# Altium PCB captivate_proximity.PcbDoc
Units mil, origin at the board's own origin, x right, y up, seen from the top; angles counter-clockwise.
Board outline 5000 x 3000 mil, 2 copper layers (Top Layer, Bottom Layer), stack 62 mil thick; 24 components, 35 nets, 82 pads, 11 vias.
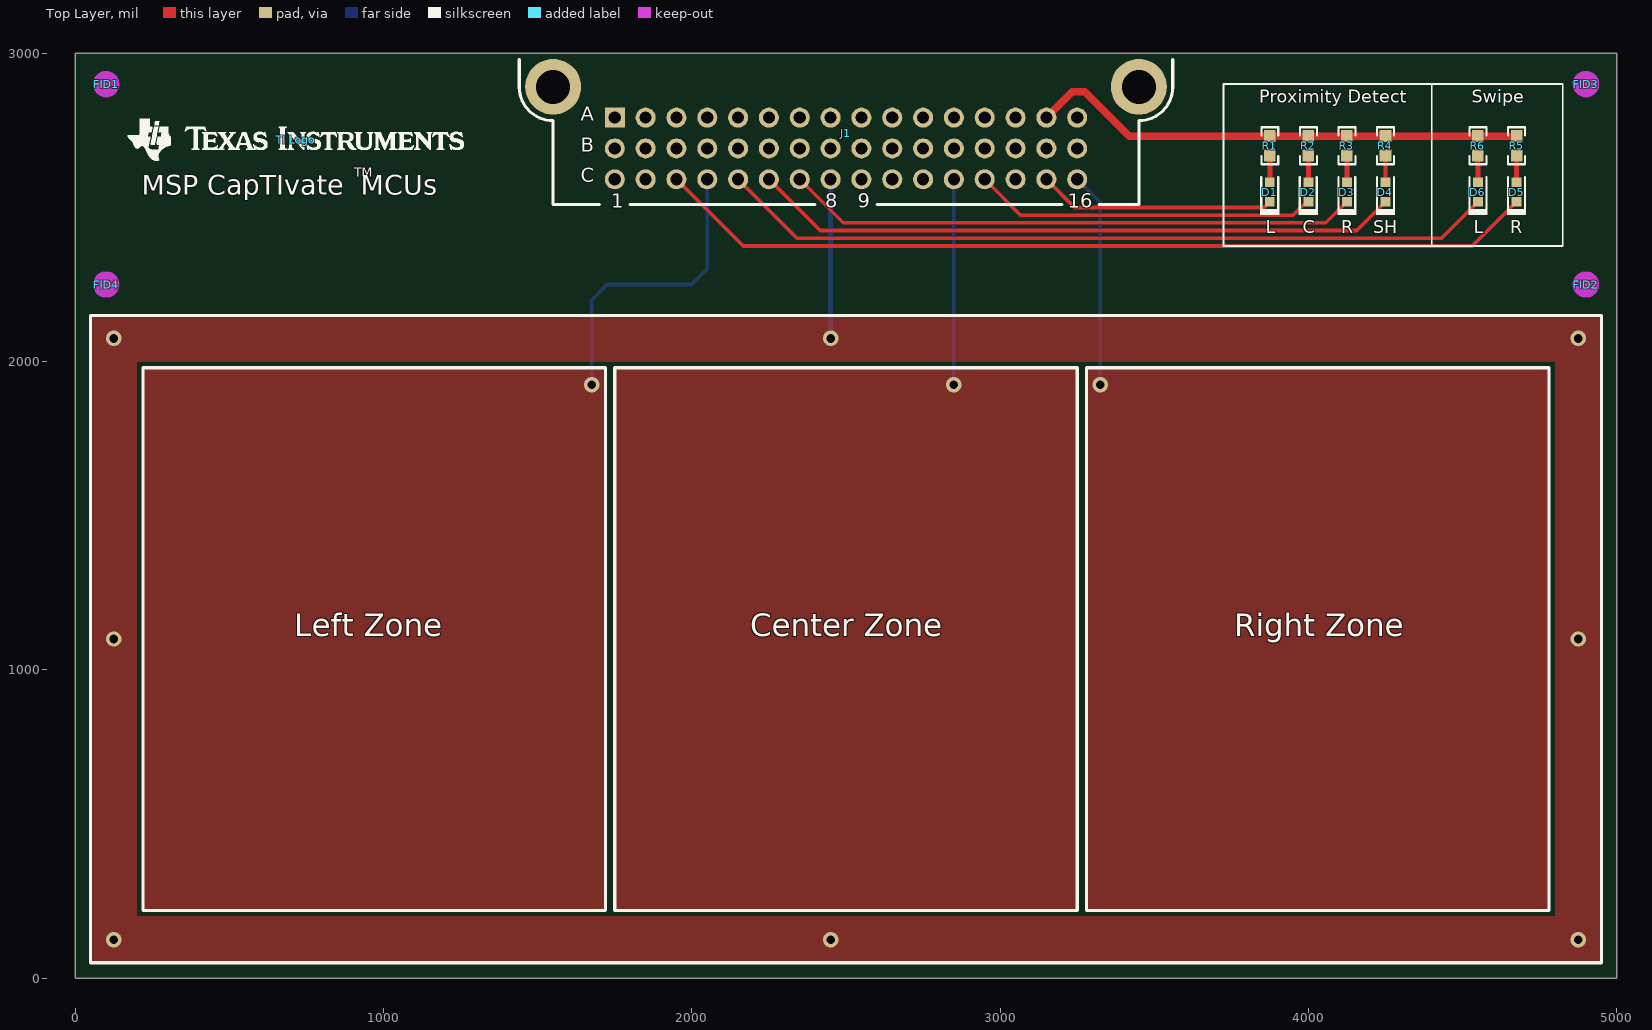
[diagram p0: Top Layer view]
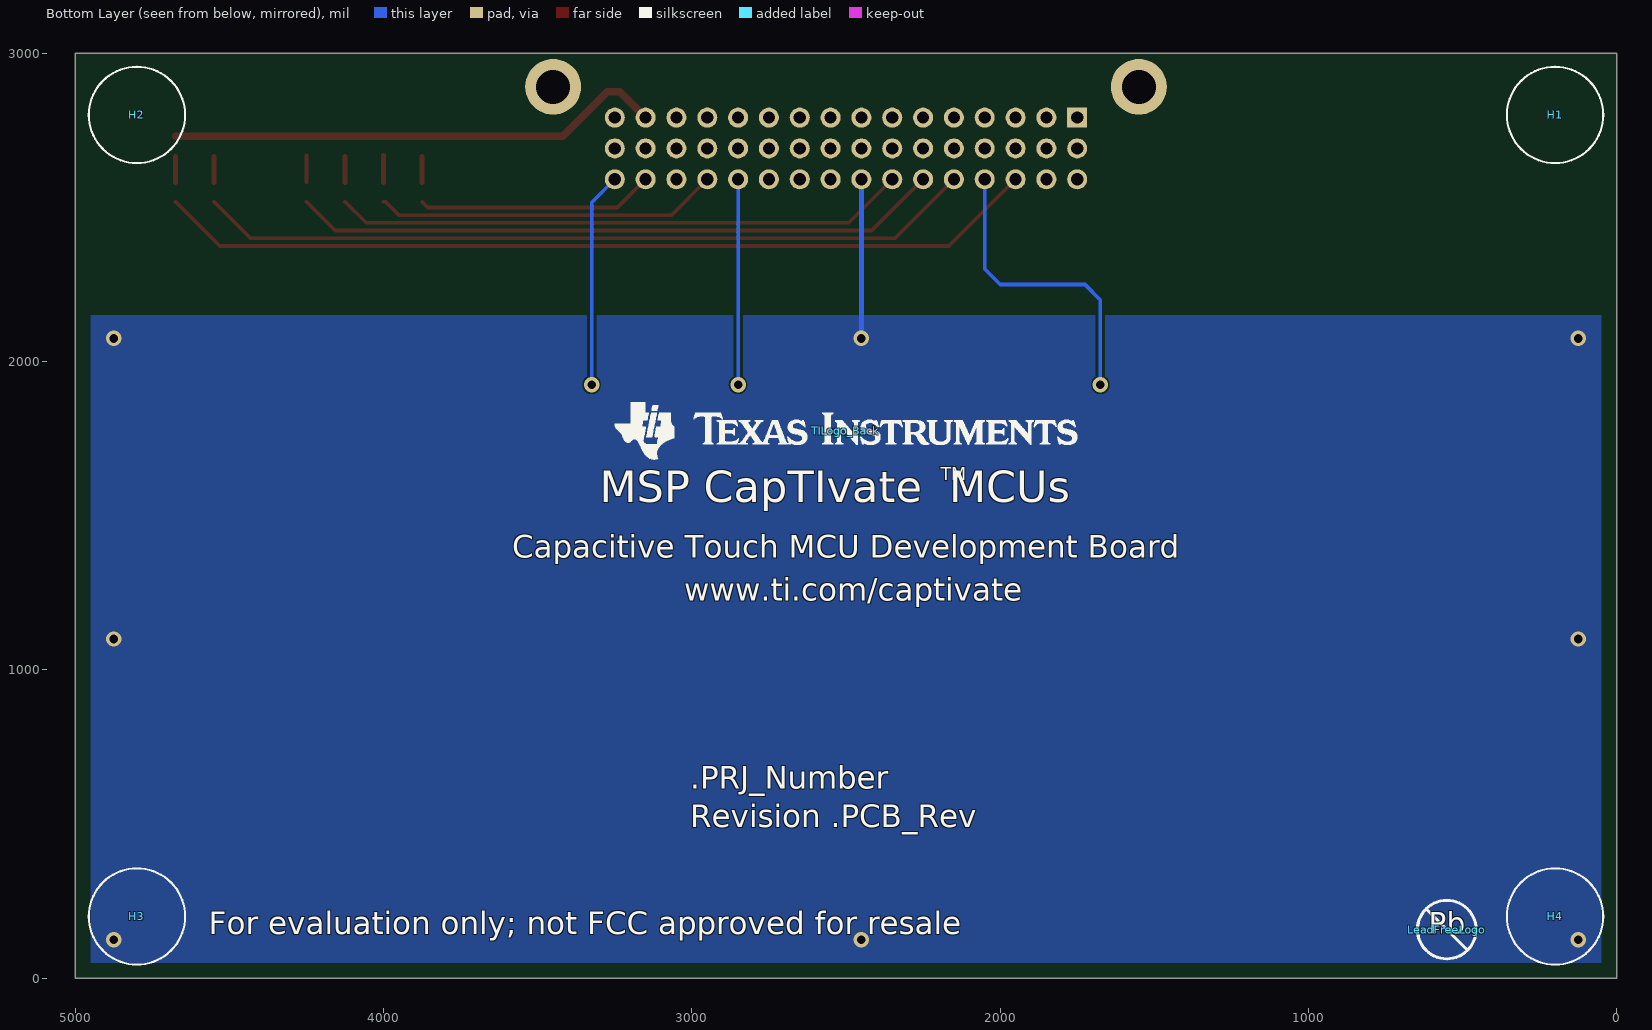
[diagram p1: Bottom Layer view, seen from below]

## Layer stack, top to bottom
Top Solder: solder mask 0.4, Solder Resist, Dk 3.5
Top Layer: signal copper 1.4
Dielectric1: core 59.2, FR-4, Dk 4.8
Bottom Layer: signal copper 1.4
Bottom Solder: solder mask 0.4, Solder Resist, Dk 3.5

## Board outline
0,0 5000,0 5000,3000 0,3000

## Design rules (kind name [scope] priority, off if disabled: settings)
AcuteAngle [All] p1: minimum=4.50000000000000E+0001 checktracksonly=FALSE
AssemblyTestPointUsage [All] p1: valid=2
Clearance Clearance_Poly_Bottom_To_Track [OnBottom And InPolygon vs IsTrack] p1: gap=10
Clearance Clearance_Poly_Connectors [(InNamedPolygon('Top Layer Pour')) OR (InNamedPolygon('Bottom Layer Pour')) vs (InComponent('J1')) OR (Incomponent('J2'))] p2: gap=40
Clearance Clearance_Poly_Components [(InNamedPolygon('Top Layer Pour')) OR (InNamedPolygon('Bottom Layer Pour'))] p3: gap=20
Clearance Clearance_General [All] p4: gap=6
Clearance Clearance_BoardEdge_MountingHoles [OnCopper and InComponentClass('Mounting Holes') vs IsKeepOut] p5: gap=40
Clearance Clearance_BoardEdge_Poly [OnCopper and InPoly vs IsKeepOut] p6: gap=7.87
Clearance Clearance_BoardEdge [OnCopper and Not InComponentClass('Logo') and not InComponentClass('FiducialMark') and not InRegion(1000,500,4000,800) and Not IsKeepout vs IsKeepOut] p7: gap=7.87
ComponentClearance ComponentClearance_Logo [InComponentClass('Logo')] p1: gap=7.87 collisioncheckmode=3 verticalgap=7.87 showdistances=TRUE
ComponentClearance ComponentClearance_ScrewToNut [(HasFootprint('NY PMS 440 0025 PH')) vs (HasFootprint('Keystone_1902C'))] p2: gap=5 collisioncheckmode=3 verticalgap=10 showdistances=FALSE
ComponentClearance ComponentClearance_MountingHoles [InComponentClass('Mounting Holes')] p3: gap=250 collisioncheckmode=3 verticalgap=100000 showdistances=FALSE
ComponentClearance ComponentClearance_SmallPassives [HasFootprint('0201*') or HasFootprint('0402*') or HasFootprint('0508') or HasFootprint('0603*') or HasFootprint('0612') or HasFootprint('0805*') or HasFootprint('0815*') or HasFootprint('0830*') or HasFootprint('1206*') or HasFootprint('1210*') or HasFootprint('1808*') or HasFootprint('1812*') or HasFootprint('1825*') or HasFootprint('2010*') or HasFootprint('2220*') or HasFootprint('2225*') or HasFootprint('2512*') or HasFootprint('2728*') or HasFootprint('3518*') vs HasFootprint('0201*') or HasFootprint('0402*') or HasFootprint('0508') or HasFootprint('0603*') or HasFootprint('0612') or HasFootprint('0805*') or HasFootprint('0815*') or HasFootprint('0830*') or HasFootprint('1206*') or HasFootprint('1210*') or HasFootprint('1808*') or HasFootprint('1812*') or HasFootprint('1825*') or HasFootprint('2010*') or HasFootprint('2220*') or HasFootprint('2225*') or HasFootprint('2512*') or HasFootprint('2728*') or HasFootprint('3518*')] p4: gap=20 collisioncheckmode=3 verticalgap=10 showdistances=FALSE
ComponentClearance ComponentClearance_THtoSMT [IsThruComponent vs IsSMTComponent] p5: gap=10 collisioncheckmode=3 verticalgap=100000 showdistances=TRUE
ComponentClearance ComponentClearance_THtoTH [IsThruComponent vs IsThruComponent] p6: gap=50 collisioncheckmode=3 verticalgap=100000 showdistances=FALSE
ComponentClearance [All] p7: gap=40 collisioncheckmode=3 verticalgap=10 showdistances=FALSE
DiffPairsRouting [All] p1: maxlimit=100 minlimit=10 mostfreqgap=10 toplayer_minwidth=15 toplayer_maxwidth=15 toplayer_prefwidth=15 bottomlayer_minwidth=15 bottomlayer_maxwidth=15 bottomlayer_prefwidth=15 maxuncoupledlength=1000
FabricationTestPointUsage TestPointUsage [All] p1: valid=2 allowmultiple=FALSE
FabricationTestpoint Testpoint [All] p1: side=3 testpointundercomponent=TRUE minsize=40 maxsize=100 preferedsize=60 minholesize=0 maxholesize=40 preferedholesize=32 testpointgrid=1 allowsidetop=TRUE allowsidebottom=TRUE usegrid=TRUE gridtolerance=0.01
FanoutControl Fanout_LCC [IsLCC] p1: bgadir=Out bgaviamode=Centered fanoutstyle=Auto fanoutdirection=Alternating viagrid=1 // Fanout_LCC (Default Rule)
FanoutControl Fanout_BGA [IsBGA] p2: bgadir=Out bgaviamode=Centered fanoutstyle=Auto fanoutdirection=Alternating viagrid=1 // Fanout_BGA (Default Rule)
FanoutControl Fanout_Default [All] p4: bgadir=Out bgaviamode=Centered fanoutstyle=Auto fanoutdirection=Alternating viagrid=1 // Fanout_Default (Default Rule)
FanoutControl Fanout_Small [(CompPinCount < 5)] p5: bgadir=Out bgaviamode=Centered fanoutstyle=Auto fanoutdirection=OutThenIn viagrid=1 // Fanout_Small (Default Rule)
HoleSize [All] p1: absolutevalues=TRUE maxlimit=251 minlimit=8 maxpercent=80.000 minpercent=20.000
MinimumAnnularRing [All] p1: minimumring=9
MinimumSolderMaskSliver MinimumSolderMaskSliver_Logo [InComponentClass('Logo') vs InComponentClass('Logo')] p1: minsoldermaskwidth=0.7
MinimumSolderMaskSliver [All] p2: minsoldermaskwidth=4
PlaneConnect [All] p1: planeconnectstyle=Relief reliefexpansion=10 reliefentries=4 reliefconductorwidth=10 reliefairgap=10
PolygonConnect [All] p1: connectstyle=Direct reliefconductorwidth=10 reliefentries=4 polygonreliefangle="45 Angle" airgapwidth=10
RoutingVias [All] p1: holewidth=16 width=34 viastyle="Through Hole" minholewidth=8 minwidth=26 maxholewidth=40 maxwidth=65
SilkToSilkClearance [All] p1: silktosilkclearance=5
SilkToSolderMaskClearance SilkscreenOverComponentPads [IsPad] p1: minsilkscreentomaskgap=5 clearancetoexposedcopper=TRUE
SolderMaskExpansion [All] p1: expansion=3
UnpouredPolygon [All] p1: allowunpoured=FALSE
Width [All] p1: maxlimit=100 minlimit=6 preferedwidth=10 checkconnectedcopper=TRUE
15 further rules are at their usual default settings.

## Classes and differential pairs
component class FiducialMark: FID1 FID2 FID3 FID4
component class Logo: "TI Logo" TILogo_Back

## Components (designator, comment, footprint, x,y, rotation, side; value= is the part's Value field where it differs from the comment)
D1 "150060YS75000" WL-SMCW_YELLOW 3875,2550 r90 top
D2 "150060YS75000" WL-SMCW_YELLOW 4000,2550 r90 top
D3 "150060YS75000" WL-SMCW_YELLOW 4125,2550 r90 top
D4 "150060YS75000" WL-SMCW_YELLOW 4250,2550 r90 top
D5 "150060VS75000" WL-SMCW_GREEN 4675,2550 r90 top
D6 "150060VS75000" WL-SMCW_GREEN 4550,2550 r90 top
FID1 "Fiducial" Fiducial10-20 100,2900 r0 top
FID2 "Fiducial" Fiducial10-20 4900,2250 r0 top
FID3 "Fiducial" Fiducial10-20 4900,2900 r0 top
FID4 "Fiducial" Fiducial10-20 100,2250 r0 top
H1 "SJ61A1" Bumpon_SJ61A1 200,2800 r90 bottom
H2 "SJ61A1" Bumpon_SJ61A1 4800,2800 r90 bottom
H3 "SJ61A1" Bumpon_SJ61A1 4800,200 r90 bottom
H4 "SJ61A1" Bumpon_SJ61A1 200,200 r90 bottom
J1 "CAPTIVATE-CONN-PANEL" CAPTIVATE-CONN-48 2500,3000 r0 top
LeadFreeLogo "Pb-Free Symbol" Pb-Free_Overlay_Medium 551.18,157.48 r180 bottom
R1 "CRCW0603274RFKEA" 0603 3875,2700 r270 top
R2 "CRCW0603274RFKEA" 0603 4000,2700 r270 top
R3 "CRCW0603274RFKEA" 0603 4125,2700 r270 top
R4 "CRCW0603274RFKEA" 0603 4250,2700 r270 top
R5 "CRCW0603274RFKEA" 0603 4675,2700 r270 top
R6 "CRCW0603274RFKEA" 0603 4550,2700 r270 top
"TI Logo" "Texas Instruments" TI_Horizontal_Overlay_Small 715,2720 r0 top
TILogo_Back "Texas Instruments" TI_Horizontal_Overlay_Medium 2500,1775 r180 bottom

## Footprints (in the part's own frame and the unit in brackets; to place one, negate y for a bottom-side part, rotate by r counter-clockwise, add the part's x,y. Pads: shape width x height; smd on the part's side, far side on the other; paste and mask are expansions set on the pad)
0603 [mm] "0603 from SM-752 data"
  rect 1x0.95 smd: 1(-0.8,0) 2(0.8,0)
  silkscreen extent -1.52,-0.69 1.52,0.69, body extent -0.87,-0.47 0.87,0.47, height 0.85
Bumpon_SJ61A1 [mil] "3M Cylindrical Bumpon black"
  round 1 on Mech4: 0(0,0)
  silkscreen extent -156,-156 156,156, body extent -156,-155 156,156, height 201
CAPTIVATE-CONN-48 [mm] "Connector, 3x16, 100mil, TH, RA"
  rect 1.65x1.65 hole 1: A1(-19.05,-5.3)
  round 1.65 hole 1: A2(-16.51,-5.3) A3(-13.97,-5.3) A4(-11.43,-5.3) A5(-8.89,-5.3) A6(-6.35,-5.3) A7(-3.81,-5.3) A8(-1.27,-5.3) A9(1.27,-5.3) A10(3.81,-5.3) A11(6.35,-5.3) A12(8.89,-5.3) A13(11.43,-5.3) A14(13.97,-5.3) A15(16.51,-5.3) A16(19.05,-5.3) B1(-19.05,-7.84) B2(-16.51,-7.84) B3(-13.97,-7.84) B4(-11.43,-7.84) B5(-8.89,-7.84) B6(-6.35,-7.84) B7(-3.81,-7.84) B8(-1.27,-7.84) B9(1.27,-7.84) B10(3.81,-7.84) B11(6.35,-7.84) B12(8.89,-7.84) B13(11.43,-7.84) B14(13.97,-7.84) B15(16.51,-7.84) B16(19.05,-7.84) C1(-19.05,-10.38) C2(-16.51,-10.38) C3(-13.97,-10.38) C4(-11.43,-10.38) C5(-8.89,-10.38) C6(-6.35,-10.38) C7(-3.81,-10.38) C8(-1.27,-10.38) C9(1.27,-10.38) C10(3.81,-10.38) C11(6.35,-10.38) C12(8.89,-10.38) C13(11.43,-10.38) C14(13.97,-10.38) C15(16.51,-10.38) C16(19.05,-10.38)
  round 4.6 hole 2.8: H1(-24.13,-2.76) H2(24.13,-2.76)
  silkscreen extent -26.92,-12.45 26.92,-0.51
Fiducial10-20 [mm]
  round 1 smd mask+0.5: 1(0,0)
  Top Layer keep-out circle w1.178: c0,0 r0.5
Pb-Free_Overlay_Medium [mil]
  silkscreen extent -95,-95 95,95
TI_Horizontal_Overlay_Medium [mil]
  silkscreen extent -750,-93 750,94
TI_Horizontal_Overlay_Small [mil]
  silkscreen extent -545,-68 545,67
WL-SMCW_GREEN [mm] "WURTH"
  rect 0.8x0.8 smd: 1(-0.8,0) 2(0.8,0)
  silkscreen extent -1.9,-0.8 1.2,0.8, body extent -0.85,-0.45 0.85,0.45, height 0.8
WL-SMCW_YELLOW [mm] "WURTH"
  rect 0.8x0.8 smd: 1(-0.8,0) 2(0.8,0)
  silkscreen extent -1.9,-0.8 1.2,0.8, body extent -0.85,-0.45 0.85,0.45, height 0.8

## Part data
D1 D2 D3 D4: "LED, Yellow, SMD"
D5 D6: "LED, Green, SMD"
FID1 FID2 FID3 FID4: "Fiducial mark.  There is nothing to buy or mount."
H1 H2 H3 H4: "Bumpon, Cylindrical, 0.312 X 0.200, Black"
J1: library part CAPTIVATE-CONN-MSP-EXP430FR2633-PANEL, "CapTIvate Panel-Side Connector, 3x16, 100mil, TH, RA, M, MSP-EXP430FR2633"
LeadFreeLogo: library part Pb-Free
R1 R2 R3 R4 R5 R6: "RES, 274, 1%, 0.1 W, 0603"
"TI Logo" TILogo_Back: library part TI_Logo, "Texas Instrument Corporate Signature"

## Via types
v1: diameter 50, hole 28, Top Layer to Bottom Layer, tented both sides, 11 vias

## Nets (pads, with @x,y where several pads share a name; then routed paths per layer and width w, separated by ;. In a path a pad name is that pad's centre, name@x,y a point inside that pad or via, vN(x,y) a via of type N, cw(c..) or ccw(c..) an arc to the next point about the centre after c; other vN are vias at no path point)
CAP0.2: D5.1 J1.C3 | length 2874.1
  Top Layer w12: J1.C3 2166.34,2375 4531.5,2375 D5.1
CAP0.3: J1.C4 | length 982.8
  Bottom Layer w12: v1(1675,1925) 1675,2200 1725,2250 2000,2250 2050,2300 J1.C4
CAP1.0: D6.1 J1.C5 | length 2528.3
  Top Layer w12: J1.C5 2341.34,2400 4431.5,2400 D6.1
CAP1.1: D4.1 J1.C6 | length 2107.6
  Top Layer w12: J1.C6 2416.34,2425 4156.5,2425 D4.1
CAP1.2: D3.1 J1.C7 | length 1861.9
  Top Layer w12: J1.C7 2491.34,2450 4056.5,2450 D3.1
CAP1.3: J1.C8 | length 516.3
  Bottom Layer w16: v1(2450,2075) J1.C8
  other v1: 125,125 2450,125 4875,125 125,1100 4875,1100 125,2075 4875,2075
CAP2.3: J1.C12 | length 666.3
  Bottom Layer w12: v1(2850,1925) J1.C12
CAP3.0: D2.1 J1.C13 | length 1116.2
  Top Layer w12: J1.C13 3066.34,2475 3950,2475 3993.5,2518.5 D2.1
CAP3.2: D1.1 J1.C15 | length 770.5
  Top Layer w12: J1.C15 3241.34,2500 3856.5,2500 D1.1
CAP3.3: J1.C16 | length 697.4
  Bottom Layer w12: J1.C16 3325,2516.34 v1(3325,1925)
E0_LED: D1.2 R1.2 | length 84.1
  Top Layer w16: D1.2 R1.2@3875,2665.57
E1_LED: D2.2 R2.2 | length 87
  Top Layer w16: D2.2 R2.2
E2_LED: D3.2 R3.2 | length 84.1
  Top Layer w16: D3.2 R3.2@4125,2665.57
NetJ1_A1: J1.A1
NetJ1_A2: J1.A2
NetJ1_A3: J1.A3
NetJ1_A4: J1.A4
NetJ1_A5: J1.A5
NetJ1_A11: J1.A11
NetJ1_A12: J1.A12
NetJ1_A13: J1.A13
NetJ1_A14: J1.A14
NetJ1_A16: J1.A16
NetJ1_C1: J1.C1
NetJ1_C2: J1.C2
NetJ1_C9: J1.C9
NetJ1_C10: J1.C10
NetJ1_C11: J1.C11
NetJ1_C14: J1.C14
NetJ1_H1: J1.H1
NetJ1_H2: J1.H2
SHIELD_LED: D4.2 R4.2 | length 87
  Top Layer w12: D4.2 R4.2
SL_LED: D6.2 R6.2 | length 84.1
  Top Layer w16: D6.2 R6.2@4550,2665.57
SR_LED: D5.2 R5.2 | length 84.1
  Top Layer w16: D5.2 R5.2@4675,2665.57
VCC_3P3V: J1.A15 R1.1 R2.1 R3.1 R4.1 R5.1 R6.1 | length 1619.1
  Top Layer w24: J1.A15 3233.66,2875 3275,2875 3418.5,2731.5 R1.1 R6.1 R5.1
pads on no net: FID1.1 FID2.1 FID3.1 FID4.1 H1.0 H2.0 H3.0 H4.0 J1.A6 J1.A7 J1.A8 J1.A9 J1.A10 J1.B1 J1.B2 J1.B3 J1.B4 J1.B5 J1.B6 J1.B7 J1.B8 J1.B9 J1.B10 J1.B11 J1.B12 J1.B13 J1.B14 J1.B15 J1.B16

## Polygon pours and split planes (outlines as drawn)
CAP1.3 on Bottom Layer "Bottom Layer-No Net" (solid, remove dead copper, pour order 8): 50,2150 50,50 4950,50 4950,2150 50,2150
CAP1.3 on Top Layer "Top Layer-No Net 3" (solid, remove dead copper, pour order 16): 50,200 4950,200 4950,50 50,50 50,200
CAP1.3 on Top Layer "Top Layer-No Net 2" (solid, remove dead copper, pour order 14): 50,2150 4950,2150 4950,2000 50,2000 50,2150
CAP1.3 on Top Layer "Top Layer-No Net 1" (solid, remove dead copper, pour order 12): 4800,2150 4800,50 4950,50 4950,2150 4800,2150
CAP1.3 on Top Layer "Top Layer-No Net" (solid, remove dead copper, pour order 10): 50,2150 200,2150 200,50 50,50 50,2150
CAP0.3 on Top Layer "Top Layer-No Net 4" (solid, remove dead copper, pour order 7): 220,1980 1720,1980 1720,220 220,220 220,1980
CAP2.3 on Top Layer "Top Layer-No Net 5" (solid, remove dead copper, pour order 9): 1750,1980 3250,1980 3250,220 1750,220 1750,1980
CAP3.3 on Top Layer "Top Layer-No Net 6" (solid, remove dead copper, pour order 11): 3280,1980 4780,1980 4780,220 3280,220 3280,1980

## Silkscreen, mask and mechanical layers (free items; w line width, h text height)
Top Overlay:
  lines w6: 4400,2375 4400,2900 ; 3725,2375 3725,2900 4825,2900 4825,2375 3725,2375
  lines w10: 50,50 50,2150 4950,2150 4950,50 50,50 ; 220,220 220,1980 1720,1980 1720,220 220,220 ; 1750,220 1750,1980 3250,1980 3250,220 1750,220 ; 3280,220 3280,1980 4780,1980 4780,220 3280,220
  text "Proximity Detect" at 3840,2825 h70
  text "Swipe" at 4530,2825 h70
  text "TM" at 905,2590 h50
  text "MSP CapTIvate  MCUs" at 215,2520 h110
  text "L" at 3862,2402 h70
  text "C" at 3982,2402 h70
  text "R" at 4107,2402 h70
  text "SH" at 4211,2402 h70
  text "L" at 4537,2402 h70
  text "R" at 4655,2402 h70
  text "Left Zone" at 710,1085 h125
  text "Center Zone" at 2190,1085 h125
  text "Right Zone" at 3760,1085 h125
Bottom Overlay:
  text "TM" at 2192.52,1600 h70
  text "MSP CapTIvate  MCUs" at 3298.52,1509 h175
  text "Capacitive Touch MCU Development Board" at 3582.68,1338.58 h125
  text "www.ti.com/captivate" at 3025,1200 h125
  text ".PRJ_Number" at 3005,590 h125
  text ".PCB_Rev" at 2550,465 h125
  text "Revision" at 3005,465 h125
  text "For evaluation only; not FCC approved for resale" at 4566.93,118.11 h125
M1 Board Outline:
  the board outline again, w10
M2 Board Dimensions:
  rectangle: -510.5,-1745.5 -385.5,-1620.5
  rectangle: -385.5,-1870.5 -10.5,-1745.5
  lines w7: -510.5,-1745.5 489.5,-1745.5 ; -385.5,-1870.5 -385.5,-1620.5 ; -260.5,-1870.5 -260.5,-1620.5 ; -10.5,-1870.5 -10.5,-1620.5 ; 239.5,-1870.5 239.5,-1620.5 ; -510.5,-1870.5 489.5,-1870.5 489.5,-1620.5 -510.5,-1620.5 -510.5,-1870.5
  lines w10: -510.5,-1935.5 -510.5,-1915.5 ; -450.5,-1945.5 -510.5,-1925.5 ; -450.5,-1905.5 -510.5,-1925.5 ; -286.42,-1925.5 -510.5,-1925.5 ; 265.42,-1925.5 489.5,-1925.5 ; 429.5,-1945.5 489.5,-1925.5 ; 429.5,-1905.5 489.5,-1925.5 ; 489.5,-1935.5 489.5,-1915.5
  text "1000 (mil)" at -276.42,-1961.49 h60
M3 3D STEP Top:
  text ".Layer_Name" at 67,-2318.49 h60
M4 3D STEP Bottom:
  text ".Layer_Name" at 67,-2318.49 h60
M5 Assembly Top:
  lines w7: 9529,-1749.5 10654,-1749.5 ; 9529,-1627 10651.5,-1627 ; 9844,-1869.5 9844,-1507 ; 10229,-1869.5 9529,-1869.5 ; 10229,-1507 9529,-1507 ; 9529,-1869.5 10654,-1869.5 10654,-1507 9529,-1507 ; 9529,-1869.5 9529,-1507
  lines w10: -802,-2390.17 5798,-2390.17 ; -802,-2186.83 5800,-2186.83 ; -802,-1983.5 -802,-2593.5 3203,-2593.5 5800,-2593.5 5800,-1983.5 -801.5,-1983.5 -801.5,-2593.5 774,-2593.5 ; 1663,-2593.5 1663,-1983.5 ; 2930,-2186.83 2930,-1983.5 ; 3770,-2186.83 3770,-1983.5 ; 4392,-2600 4392,-2397.17
  text "TABLE 1" at 9916.5,-1472 h40
  text "Variant" at 9554,-1582 h40
  text "Label text" at 9989,-1582 h40
  text "001" at 9621.5,-1702 h40
  text "ChangeMe!" at 9899,-1704.5 h40
  text "COMPONENTS MARKED 'DNP' SHOULD NOT BE POPULATED." at 643.5,-1778.5 h60
  text "002" at 9621.5,-1827 h40
  text "ChangeMe!" at 9894,-1829.5 h40
  text "ASSEMBLY VARIANT:" at 643,-1894 h60
  text ".VariantName" at 1679,-1894 h60
  text "PCB VIEWED FROM TOP SIDE" at -738.5,-2115.67 h60
  text "BOARD #:" at 1738,-2115.67 h60
  text ".PRJ_Number" at 2283.5,-2115.67 h60
  text "REV:" at 3128,-2115.67 h60
  text ".PCB_Rev" at 3419.5,-2115.67 h60
  text "SVN REV:" at 3966,-2115.67 h60
  text ".VersionControl_RevNumber" at 4472,-2115.67 h60
  text "IGNORE ->" at -738.5,-2318.49 h60
  text "PLOT NAME =" at -738.5,-2524.34 h60
  text ".plot_File_Name" at 67,-2524.34 h60
  text "GENERATED    :" at 1740,-2524.34 h60
  text ".Print_Date" at 2609.5,-2524.34 h60
  text ".Print_Time" at 3338.5,-2524.34 h60
  text "TEXAS INSTRUMENTS" at 4603,-2524.34 h60
M6 Assembly Bottom:
  lines w10: -802.5,-2187.33 5799.5,-2187.33 ; -800.5,-2390.67 5799.5,-2390.67 ; 605.5,-2600.5 605.5,-2397.67 ; 1227.5,-2187.33 1227.5,-1984 ; 2067.5,-2187.33 2067.5,-1984 ; 3334.5,-2594 3334.5,-1984 ; 4223.5,-2594 5799,-2594 5799,-1984 -802.5,-1984 -802.5,-2594 1794.5,-2594 5799.5,-2594 5799.5,-1984
  text "COMPONENTS MARKED 'DNP' SHOULD NOT BE POPULATED." at 5592,-1778 h60
  text ".VariantName" at 4548,-1894 h60
  text "ASSEMBLY VARIANT:" at 5587,-1894 h60
  text ".PCB_Rev" at 1860,-2110 h60
  text ".PRJ_Number" at 2714,-2116.17 h60
  text "BOARD #:" at 3259.5,-2116.17 h60
  text "PCB VIEWED FROM BOTTOM SIDE" at 5736,-2116.17 h60
  text "IGNORE ->" at 2037.85,-2318.49 h60
  text "TEXAS INSTRUMENTS" at 394.5,-2524.84 h60
  text ".plot_File_Name" at 4930.5,-2524.84 h60
  text "PLOT NAME =" at 5736,-2524.84 h60
  text ".Print_Time" at 1690,-2530 h60
  text ".Print_Date" at 2419,-2530 h60
  text "GENERATED    :" at 3288.5,-2530 h60
M9 Title Sheet:
  drawing of 57 lines, arcs and shapes, not listed
  text "1" at 229.84,6576.5 h70
  text "2" at 2725.5,6576.5 h70
  text "3" at 5214.84,6576.5 h70
  text "4" at 7721.51,6576.5 h70
  text "5" at 10220.5,6576.5 h70
  text "6" at 12725.5,6576.5 h70
  text "A" at -926.5,5433.5 h70
  text "A" at 13873.5,5433.5 h70
  text "B" at -926.5,3053.5 h70
  text "B" at 13873.5,3053.5 h70
  text "C" at -926.5,678.5 h70
  text "C" at 13873.5,678.5 h70
  text "PROJECT TITLE:" at 10833.5,-1182.5 h45
  text "TICAPEVM_BSWPDEMO" at 10883.5,-1315.83 h70
  text "DESIGNED FOR:" at 10833.5,-1483.5 h45
  text ".PRJ_Customer" at 10883.5,-1623.5 h70
  text "D" at -926.5,-1691.5 h70
  text "D" at 13873.5,-1691.5 h70
  text "FILE NAME:" at 10833.5,-1783.5 h45
  text ".PCB_File_Name_No_Path" at 10883.5,-1903.5 h70
  text "Texas Instruments (TI) and/or its licensors do not warrant the accuracy or completeness of this specification" at 5864,-2065.34 h45
  text "ENGINEER:" at 10833.5,-2073.5 h45
  text "LAYOUT BY:" at 12338.5,-2073.5 h45
  text "or any information contained therein. TI and/or its licensors do not warrant that this design will meet" at 5819.01,-2178 h45
  text "W. Schnoor" at 10883.5,-2228.49 h70
  text "W. Schnoor" at 12389,-2228.49 h70
  text "the specifications, will be suitable for your application or fit for any particular purpose, or will operate in" at 5819.01,-2290.67 h45
  text "ALTIUM DESIGNER VERSION:" at 12338.5,-2383.5 h45
  text "an implementation. TI and/or its licensors do not warrant that the design is production worthy. You should" at 5819.01,-2403.33 h45
  text "completely validate and test your design implementation to confirm the system functionality for your application." at 5864,-2516 h45
  text ".print_Scale" at 10883.5,-2516.83 h70
  text ".Application_BuildNumber" at 12389,-2516.83 h70
  text "1" at 229.84,-2723.5 h70
  text "2" at 2725.5,-2723.5 h70
  text "3" at 5214.84,-2723.5 h70
  text "4" at 7721.51,-2723.5 h70
  text "5" at 10220.5,-2723.5 h70
  text "6" at 12725.5,-2723.5 h70
M10 Fab Notes:
  drawing of 207 lines, arcs and shapes, not listed
  text "DESIGN INFORMATION" at 11871.02,5350 h60
  text "(REFER ALSO ARRAY/PANEL PROFILING INFORMATION)" at 11509.46,5188.29 h60
  text "BOARD SIZE" at 10823.46,5184 h60
  text "3450MIL" at 11285.78,5056.18 h60
  text "X" at 11791.46,5056.18 h60
  text "4950MIL" at 12022.78,5056.18 h60
  text "Number of Layers :" at 11226.46,4859 h60
  text "2" at 12321.27,4849 h60
  text "MIN. TRACK WIDTH:" at 11226.46,4720 h60
  text "8" at 12322.7,4720 h60
  text "MIL" at 12477.46,4720 h60
  text "MIN. CLEARANCE:" at 11226.46,4588 h60
  text "8" at 12322.7,4588 h60
  text "MIL" at 12477.46,4588 h60
  text "MIN. VIA PAD SIZE:" at 11226.46,4456 h60
  text "24" at 12292.71,4456 h60
  text "MIL" at 12477.46,4456 h60
  text "0.05mm (2MIL)" at 11921.46,4314.29 h60
  text "MINIMUM ANNULAR RING" at 10897.23,4310 h60
  text "EXTERNAL" at 12629.46,4310 h60
  text "PER" at 11097.23,4192 h60
  text "IPC-D-275 CLASS 2 LEVEL C" at 11317.23,4192 h60
  text "MIL, HOLES" at 12805.46,4079.71 h60
  text "+/-" at 12413,4079 h60
  text "+/-" at 13267,4079 h60
  text "REGISTRATION TOLERANCES:" at 10897.23,4074 h60
  text "METAL" at 12097,4074 h60
  text "5" at 12673.2,4074 h60
  text "3" at 13506.2,4074 h60
  text "MIL" at 13622.46,4074 h60
  text "MATERIAL:" at 10822.46,3864.54 h60
  text "FR-4 High Tg" at 11808.9,3724.21 h60
  text "FR-4" at 11283.46,3715.64 h60
  text "X" at 11655.46,3715.64 h60
  text "OTHER" at 12731.46,3715.64 h60
  text "62 MIL (1.6mm) +/-10%" at 11563.56,3552.92 h60
  text "THICKNESS:" at 10897.23,3548.64 h60
  text "X" at 11435.4,3548.64 h60
  text "OTHER" at 12848.46,3548.64 h60
  text "TOLERANCE:" at 10897.23,3390.64 h60
  text "X" at 11736.53,3390.64 h60
  text "ANSI IPC-6012 TYPE 3 CLASS 2" at 11923.48,3390.64 h60
  text "OTHER +/-" at 11923.46,3234.64 h60
  text "BOW & TWIST:" at 10897.23,3077.64 h60
  text "X" at 11736.53,3077.64 h60
  text "ANSI IPC-6012 TYPE 3 CLASS 2" at 11923.48,3077.64 h60
  text "OTHER +/-" at 11923.46,2919.13 h60
  text "COPPER THICKNESS (FINISHED):" at 10822.46,2783.64 h60
  text "1.4MIL (1oz)" at 11702.46,2630.92 h60
  text "2MIL (1.4oz)" at 12469.46,2630.92 h60
  text "2.8MIL (2oz)" at 13196.46,2630.92 h60
  text "OUTER:" at 11179.46,2626.64 h60
  text "X" at 11574,2626 h60
  text "1.4MIL (1oz)" at 11702.46,2473.92 h60
  text "2.8MIL (2oz)" at 12469.46,2473.92 h60
  text "N/A" at 13196,2474.29 h60
  text "INNER SIGNAL:" at 10890.38,2469.64 h60
  text "X" at 11575.42,2469.64 h60
  text "DRILLING:" at 10822.46,2330.64 h60
  text "REFERENCE:" at 10897.23,2213.64 h60
  text "X" at 11545.46,2213.64 h60
  text "AS SHOWN" at 11732.46,2213.64 h60
  text "X" at 12446.46,2213.64 h60
  text "NC_DRILL FILES" at 12583.46,2213.64 h60
  text "PTH MIN COPPER THICKNESS:" at 10897.23,2055.64 h60
  text "X" at 12247.46,2055.64 h60
  text "1MIL" at 12384.46,2055.64 h60
  text "OTHER" at 12881.46,2055.64 h60
  text "BOARD FINISH:" at 10822.46,1896.64 h60
  text "SILKSCREEN:" at 10977.68,1778.64 h60
  text "X" at 11926.46,1778.64 h60
  text "TOP" at 12052.46,1778.64 h60
  text "X" at 12436.46,1778.64 h60
  text "BOTTOM" at 12563.46,1778.64 h60
  text "SILKSCREEN COLOR:" at 10977.68,1611.64 h60
  text "X" at 11925.42,1611.64 h60
  text "WHITE" at 12052.46,1611.64 h60
  text "OTHER" at 12563.46,1611.64 h60
  text "SOLDER RESIST COLOR:" at 10977.68,1441.64 h60
  text "GREEN" at 11672.46,1282.44 h60
  text "BLUE" at 12263.46,1282.44 h60
  text "OTHER" at 12801.46,1282.44 h60
  text "X" at 12655,1275 h60
  text "BLACK" at 13135,1275 h200
  text "IMMERSION GOLD (ENIG)" at 11883.46,1093.92 h60
  text "SURFACE FINISH:" at 10822.46,1089.64 h60
  text "X" at 11696.51,1089.64 h60
  text "IMM. TIN/SILVER OR EQUIV" at 11152,932.64 h60
  text "OTHER" at 12583.46,932.64 h60
  text "ARRAY/PANEL:" at 10822.46,753.64 h60
  text "CUT AND TRIM PER MECH LAYER 1" at 11883.46,749.35 h60
  text "N.C. ROUTE" at 11883.46,597.64 h60
  text "X" at 12562.46,597.64 h60
  text "V. SCORE" at 12749.46,597.64 h60
  text "CERTIFICATION:" at 10822.46,460.64 h60
  text "MATERIALS AND WORKMANSHIP FOR ALL PCBS" at 11547.46,460.64 h60
  text "TO MEET OR EXCEED THE REQUIREMENTS OF:" at 11547.46,362.64 h60
  text "X" at 11173.96,226.13 h60
  text "ANSI IPC-A-600F CLASS ->" at 11312.96,226.13 h60
  text "X" at 12952.02,226.13 h60
  text "2" at 13070.96,226.14 h60
  text "1" at 12755.96,224.64 h60
  text "3" at 13424.96,224.64 h60
  text "X" at 11176.02,66.64 h60
  text "UL 94V-0" at 11312.96,66.64 h60
  text "X" at 11988.02,66.64 h60
  text "RoHS" at 12124.96,66.64 h60
  text "OTHER" at 12769.36,66.64 h60
  text "PER ORDER" at 13166.42,66.64 h60
  text "ADDITIONAL REQUIREMENTS:" at 10822.46,-74.36 h60
  text "MICROSECTION:" at 10897.23,-189.36 h60
  text "YES" at 11802.96,-189.36 h60
  text "REQUIRED" at 12664.46,-345.51 h60
  text "BARE BOARD ELEC. TEST:" at 10897.23,-348.36 h60
  text "NONE" at 12202.96,-348.36 h60
  text "X" at 12537.46,-348.36 h60
  text "PER ORDER" at 13256.46,-348.36 h60
  text "MANUFACTURER'S ID/LOGO:" at 10897.23,-505.36 h60
  text "RAIL" at 12362.96,-509.65 h60
  text "X" at 12737.46,-509.65 h60
  text "METAL" at 12854.77,-509.65 h60
  text "SILK" at 13366.46,-509.65 h60
  text ".Layer_Name" at 67,-2318.49 h60
M11 Gerber Information:
  lines w10: -802,-2390.17 5798,-2390.17 ; -802,-2186.83 5800,-2186.83 ; -802,-1983.5 -802,-2593.5 3203,-2593.5 5800,-2593.5 5800,-1983.5 -801.5,-1983.5 -801.5,-2593.5 774,-2593.5 ; 1663,-2593.5 1663,-1983.5 ; 2930,-2186.83 2930,-1983.5 ; 3770,-2186.83 3770,-1983.5 ; 4392,-2600 4392,-2397.17
  text "ALL ARTWORK VIEWED FROM TOP SIDE" at -738.5,-2115.67 h60
  text "BOARD #:" at 1738,-2115.67 h60
  text ".PRJ_Number" at 2283.5,-2115.67 h60
  text "REV:" at 3128,-2115.67 h60
  text ".PCB_Rev" at 3419.5,-2115.67 h60
  text "SVN REV:" at 3966,-2115.67 h60
  text ".VersionControl_RevNumber" at 4472,-2115.67 h60
  text "LAYER NAME =" at -738.5,-2318.49 h60
  text "PLOT NAME =" at -738.5,-2524.34 h60
  text ".plot_File_Name" at 67,-2524.34 h60
  text "GENERATED    :" at 1740,-2524.34 h60
  text ".Print_Date" at 2609.5,-2524.34 h60
  text ".Print_Time" at 3338.5,-2524.34 h60
  text "TEXAS INSTRUMENTS" at 4603,-2524.34 h60
M12 Stackup:
  lines w6: 10850,6000 13400,6000 ; 10850,6104.4 13400,6104.4 ; 10790,5515 ccw(c10824,5515) 10824,5481 13426,5481 ccw(c13426,5515) 13460,5515 13460,6221 ccw(c13426,6221) 13426,6255 10824,6255 ccw(c10824,6221) 10790,6221 10790,5515
  text "The Stackup Legend below this is static." at 11095.5,6414.5 h60
  text "If you change the stackup, update the Legend." at 11105.5,6324.5 h60
  text "Layer Stack Up Detail for: Ref_Design.PcbDoc" at 10850,6137.1 h57
  text "Layer" at 10850,6065.4 h24
  text "Gerber" at 11745.81,6065.4 h24
  text "Copper" at 12309.33,6065.4 h24
  text "Dielectric" at 12912.04,6065.4 h24
  text "Name" at 10850,6017.4 h24
  text "Document" at 11745.81,6017.4 h24
  text "Thickness" at 12309.33,6017.4 h24
  text "Material" at 12912.04,6017.4 h24
  text "Top Solder Mask" at 10850,5924.44 h34
  text "(.GTS)" at 11745.81,5924.44 h34
  text "Solder Resist" at 12912.04,5924.44 h34
  text "Top Layer" at 10850,5827.69 h34
  text "(.GTL)" at 11745.81,5827.69 h34
  text "1.4mil" at 12309.33,5827.69 h34
  text "FR-4" at 12912.04,5779.31 h34
  text "Bottom Layer" at 10850,5730.94 h34
  text "(.GBL)" at 11745.81,5730.94 h34
  text "1.4mil" at 12309.33,5730.94 h34
  text "Bottom Solder Mask" at 10850,5634.19 h34
  text "(.GBS)" at 11745.81,5634.19 h34
  text "Solder Resist" at 12912.04,5634.19 h34
Mechanical 18:
  lines w1: 0,0 5000,0 5000,3000 3610,3000 ccw(c3610,2980) 3590,2980 3590,2770 cw(c3570,2770) 3570,2750 3340,2750 ccw(c3340,2710) 3300,2710 3300,2560 cw(c3280,2560) 3280,2540 1700,2540 cw(c1700,2560) 1680,2560 1680,2710 ccw(c1640,2710) 1640,2750 1430,2750 cw(c1430,2770) 1410,2770 1410,2980 ccw(c1390,2980) 1390,3000 0,3000 0,0 ; 3705,2370 ccw(c3720,2370) 3720,2355 4830,2355 ccw(c4830,2370) 4845,2370 4845,2905 ccw(c4830,2905) 4830,2920 3720,2920 ccw(c3720,2905) 3705,2905 3705,2370

## Dimensions
4780,1980 to 4780,220 on M2 Board Dimensions
5000,3000 to 5000,0 on M2 Board Dimensions
4950,50 to 4950,2150 on M2 Board Dimensions
220,220 to 4780,220 on M2 Board Dimensions
220,220 to 1720,220 on M2 Board Dimensions
1720,220 to 1750,220 on M2 Board Dimensions
1750,220 to 3250,220 on M2 Board Dimensions
3250,220 to 3280,220 on M2 Board Dimensions
0,0 to 5000,0 on M2 Board Dimensions

## Text inside footprints (layer, text, board x,y; h text height)
J1: Top Overlay "1" at 1738,2482 h80; Top Overlay "A" at 1640,2765 h80; Top Overlay "B" at 1640,2665 h80; Top Overlay "C" at 1640,2565 h80; Top Overlay "8" at 2433,2483 h80; Top Overlay "16" at 3220,2483 h80; Top Overlay "9" at 2538,2483 h80; M2 Board Dimensions "PCB Edge" at 2420,2960 h23.62
LeadFreeLogo: Bottom Overlay "Pb" at 610.43,119.66 h120